# Altium PCB PCB1.PcbDoc
Units mm, origin at the board's own origin, x right, y up, seen from the top; angles counter-clockwise.
Board outline 80 x 100 mm, 2 copper layers (Top Layer, Bottom Layer); 99 components, 60 nets, 308 pads, 689 vias.
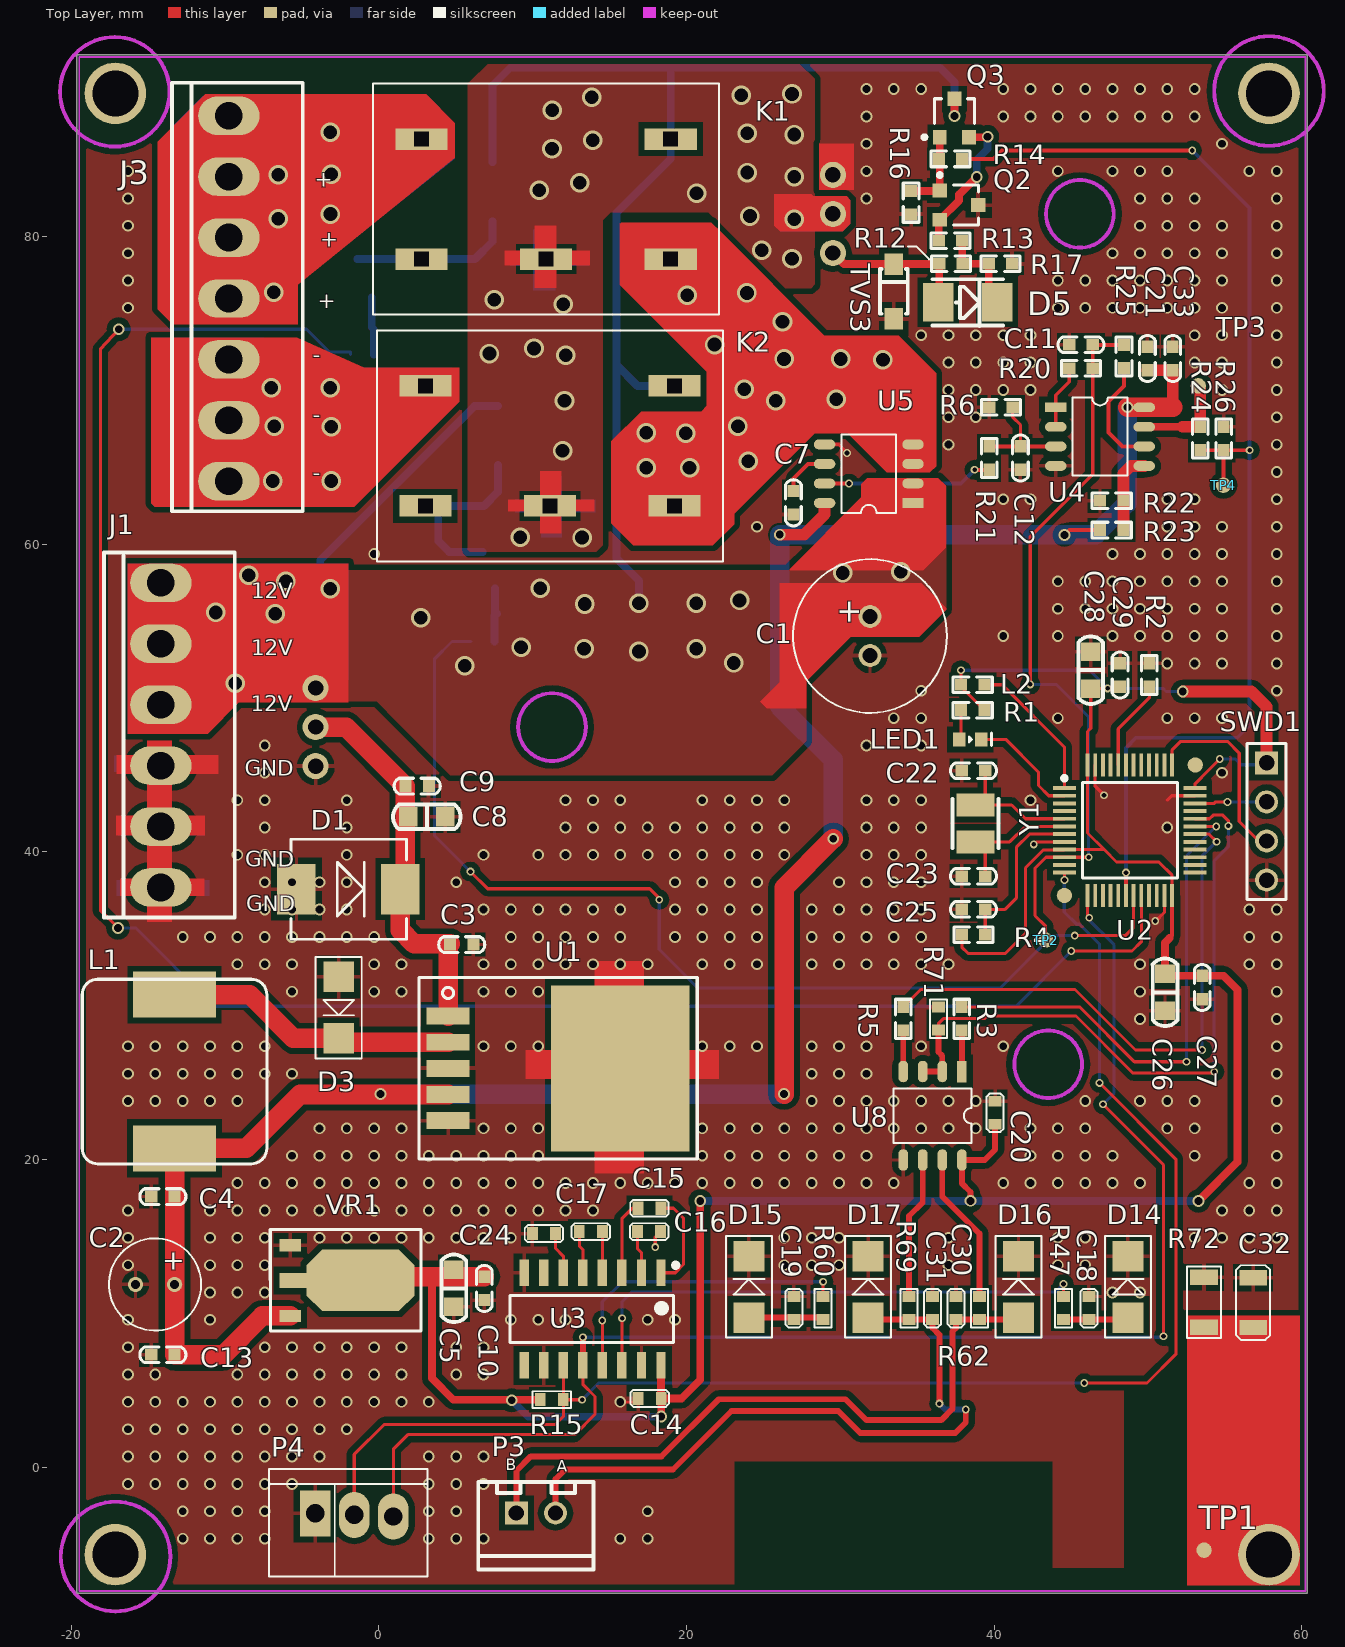
[diagram p0: Top Layer view]
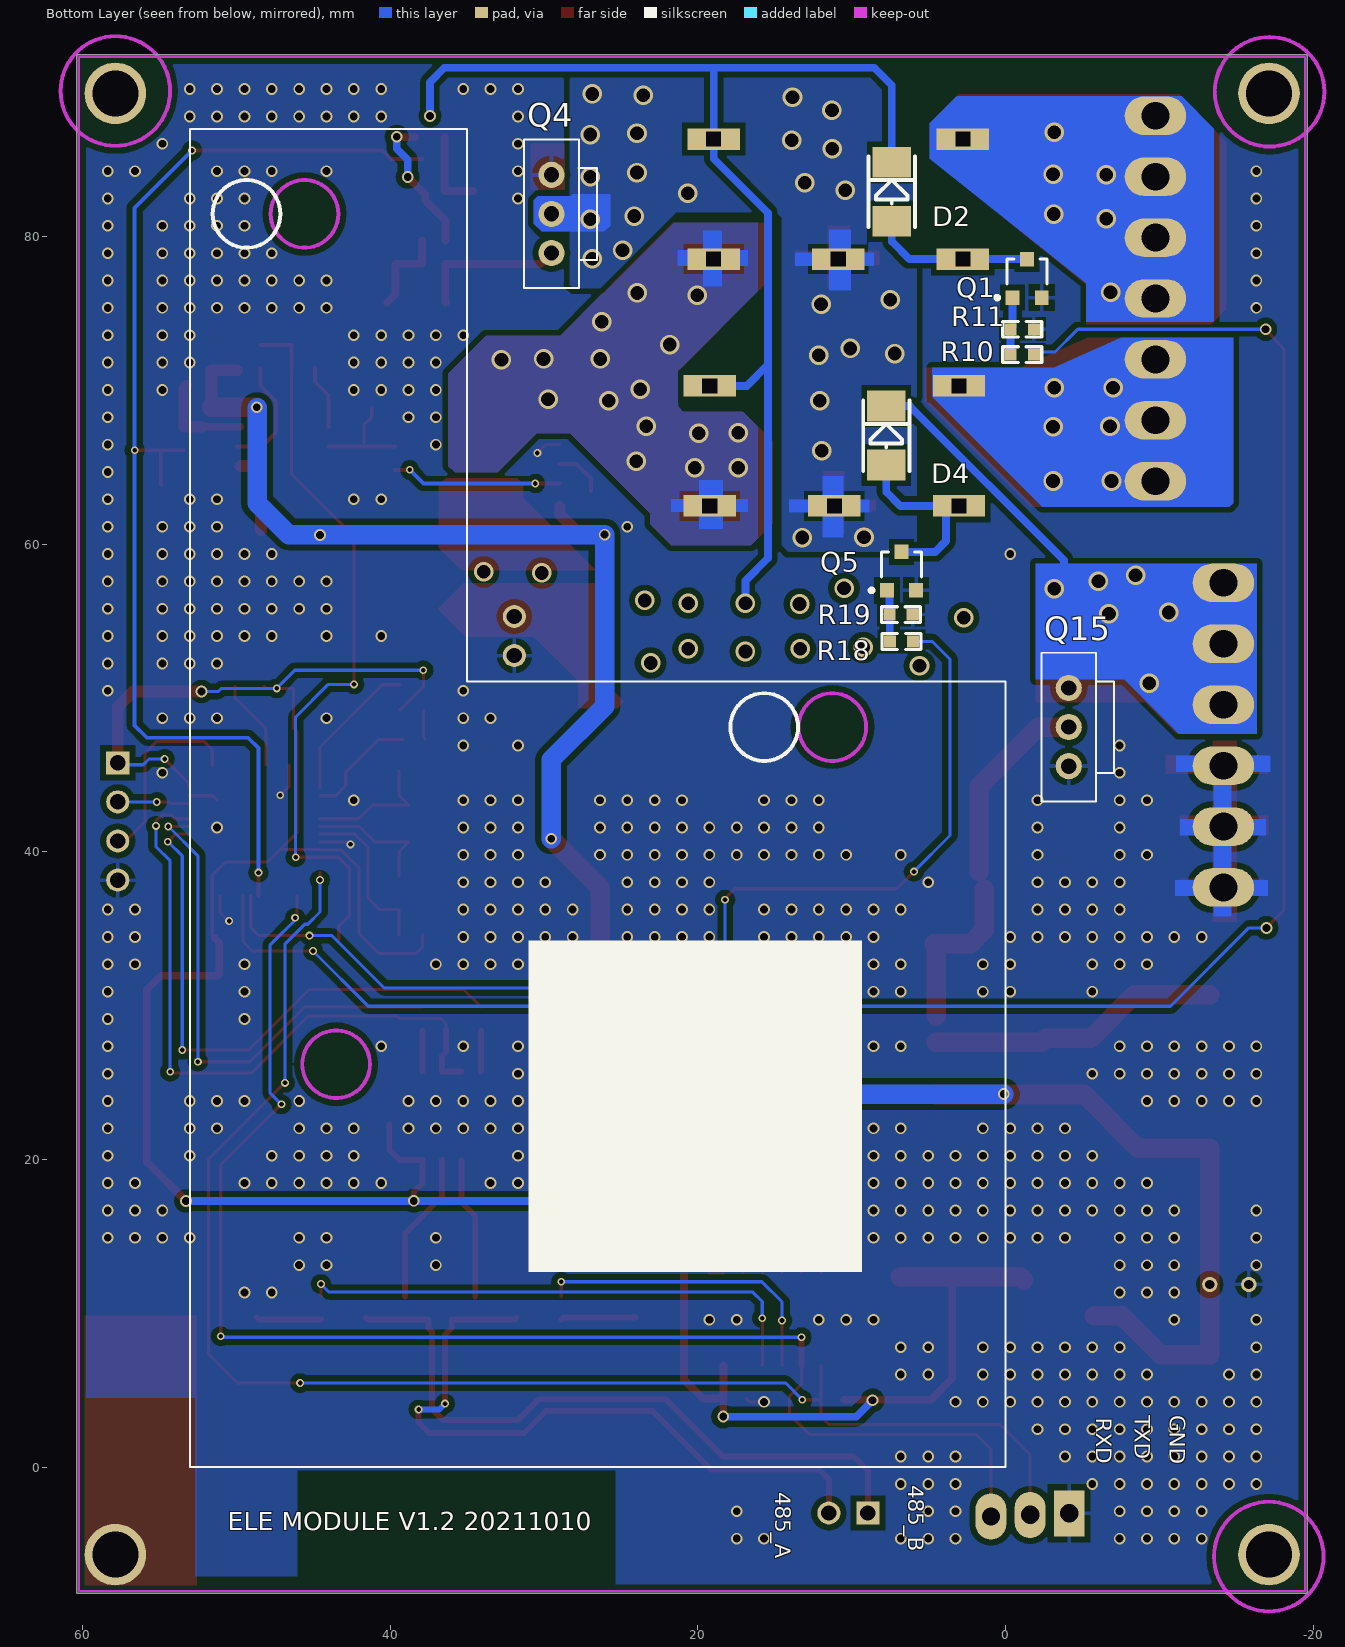
[diagram p1: Bottom Layer view, seen from below]
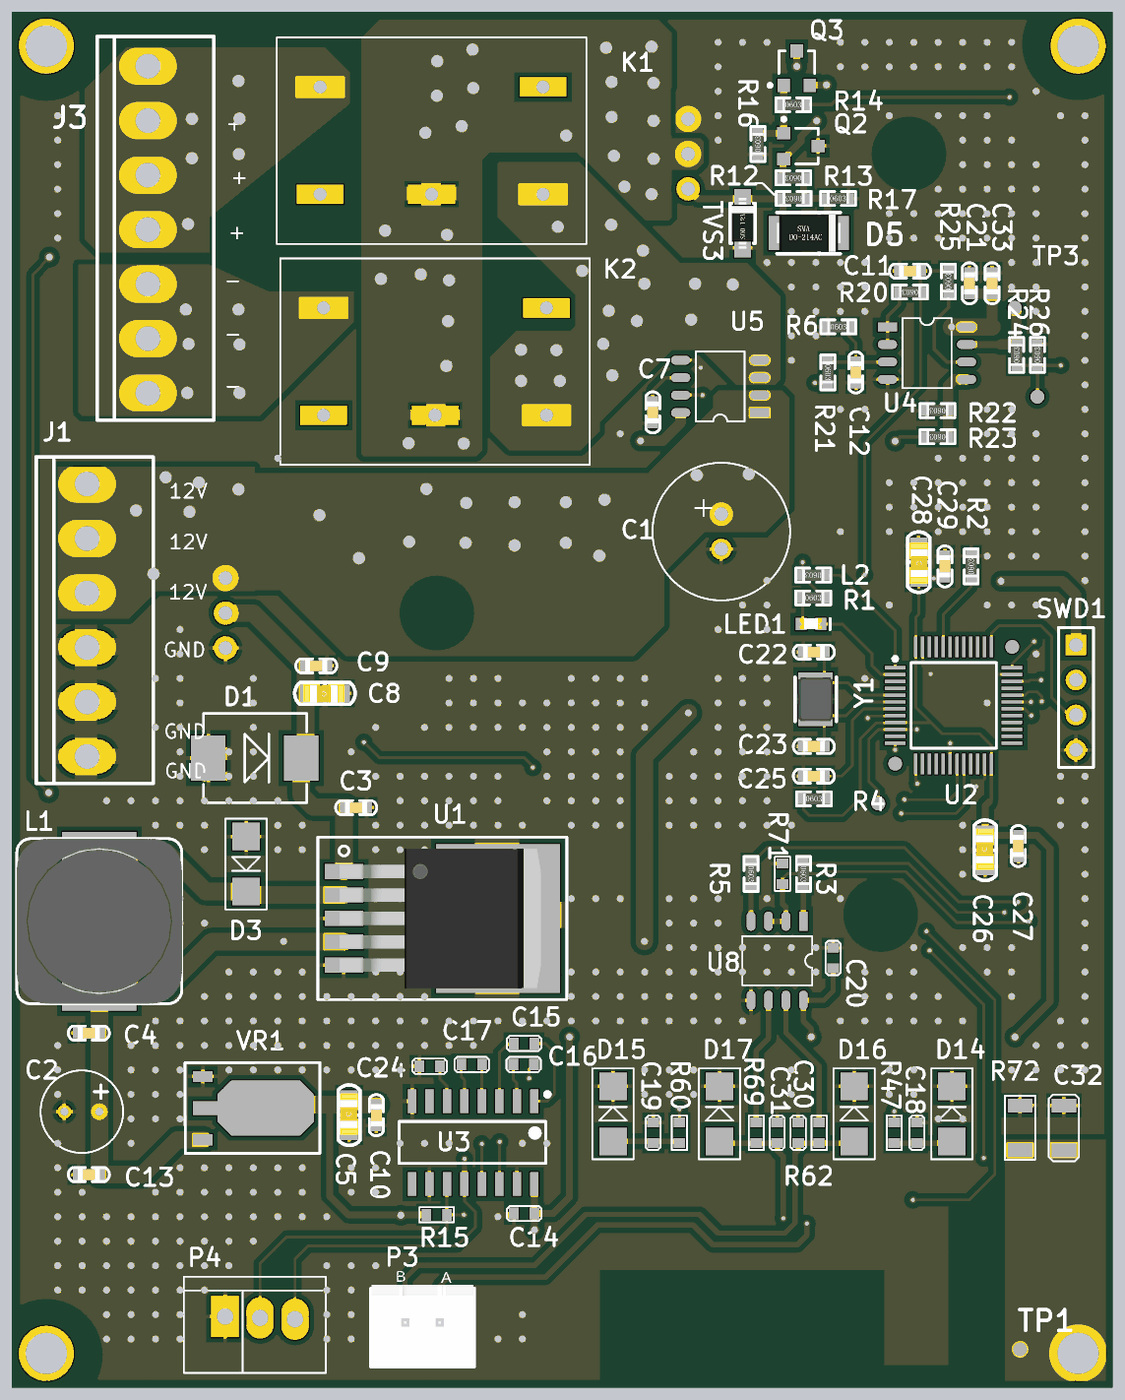
[diagram p2: 3D render of the assembled board from above, using the file's embedded part models]
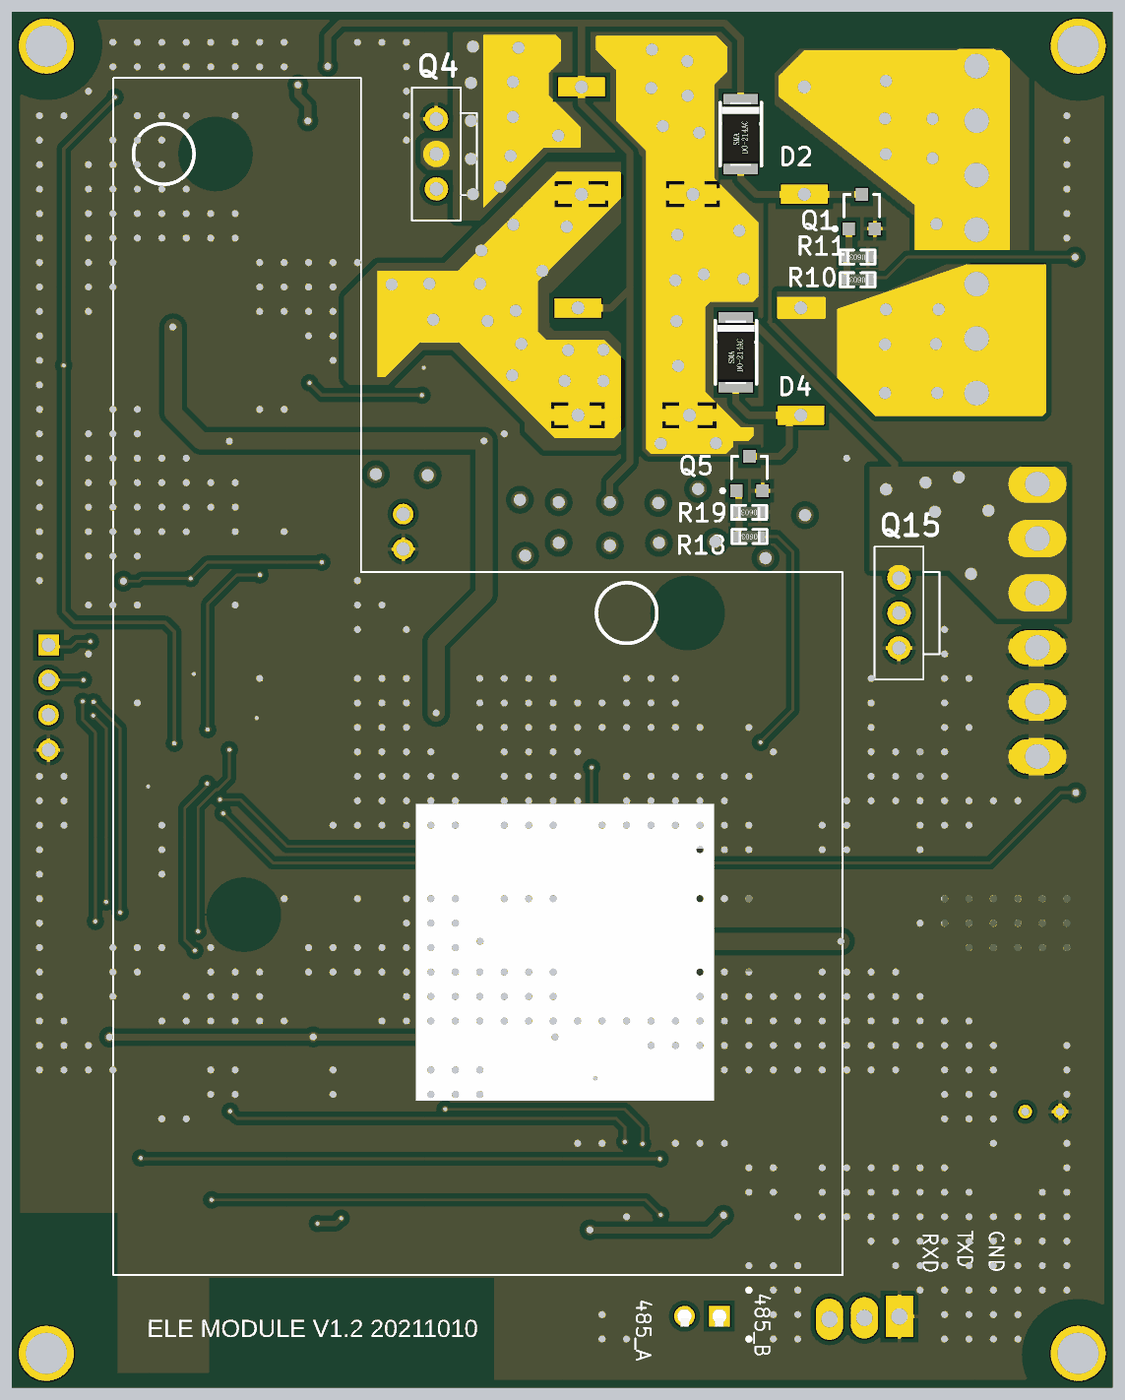
[diagram p3: 3D render of the assembled board from below, using the file's embedded part models]

## Layer stack, top to bottom
Top Solder: solder mask 0.0102, Solder Resist, Dk 3.5
Top Layer: signal copper 0.0356
Dielectric1: dielectric 0.32, FR-4, Dk 4.8
Bottom Layer: signal copper 0.0356
Bottom Solder: solder mask 0.0102, Solder Resist, Dk 3.5

## Board outline
-19.634,-8.195 -19.634,91.805 60.366,91.805 60.366,-8.195

## Design rules (kind name [scope] priority, off if disabled: settings)
Clearance gnd [All] p1: gap=0.381
Clearance [All] p2: gap=0.254
DiffPairsRouting [All] p1: maxlimit=0.254 minlimit=0.254 mostfreqgap=0.254 toplayer_minwidth=0.381 toplayer_maxwidth=0.381 toplayer_prefwidth=0.381 bottomlayer_minwidth=0.381 bottomlayer_maxwidth=0.381 bottomlayer_prefwidth=0.381 maxuncoupledlength=12.7
MinimumSolderMaskSliver [All] p1: minsoldermaskwidth=0.025
PolygonConnect PolygonConnect_1 [isvia] p1: connectstyle=Direct reliefconductorwidth=0.254 reliefentries=4 polygonreliefangle="90 Angle" airgapwidth=0.254
PolygonConnect [All] p2: connectstyle=Relief reliefconductorwidth=0.254 reliefentries=4 polygonreliefangle="90 Angle" airgapwidth=0.254
RoutingVias [All] p1: holewidth=0.711 width=1.27 viastyle="Through Hole" minholewidth=0.711 minwidth=1.27 maxholewidth=0.711 maxwidth=1.27
SilkToSolderMaskClearance [IsPad] p1: minsilkscreentomaskgap=0.025 clearancetoexposedcopper=TRUE
SolderMaskExpansion [All] p1: expansion=0.102
Width [All] p1: maxlimit=12.7 minlimit=0.127 preferedwidth=0.254
27 further rules are at their usual default settings.

## Classes and differential pairs
component class com: C14 C15 C16 C17 C18 C19 C20 C24 C30 C31 C32 D14 D15 D16 D17 P3 P4 R15 R47 R60 R62 R69 R71 R72 TP1 U3 U8
component class 07_EL_CON: C7 C11 C12 C21 C33 C? D2 D4 D5 J3 K1 K2 Q1 Q2 Q3 Q4 Q5 R6 R10 R11 R12 R13 R14 R16 R17 R18 R19 R20 R21 R22 R23 R24 R25 R26 R? TP2 TP3 TP4 TVS3 U4 U5 U?
component class 03_MCU: C22 C23 C25 C26 C27 C28 C29 L2 LED1 R1 R2 R3 R4 R5 SWD1 U2 Y1
component class 02_Power: C1 C2 C3 C4 C5 C8 C9 C10 C13 D1 D3 J1 L1 Q15 U1 VR1
differential pair 485: +485_P -485_N

## Components (designator, comment, footprint, x,y, rotation, side; value= is the part's Value field where it differs from the comment)
C1 "1000uF/35V" 10*16 31.928,54.026 r90 top
C2 "100uF/35V" 6*8 -14.554,11.871 r0 top
C3 "104 50V" SMD-0603C 5.385,33.969 r180 top
C4 "104 50V" SMD-0603C -14.046,17.586 r0 top
C5 "10uF 25V" SMD-0805C 4.877,11.617 r90 top
C7 "104 50V" SMD-0603C 26.949,62.687 r270 top
C8 "10uF25V" SMD-0805C 3.115,42.269 r180 top
C9 "104 50V" SMD-0603C 2.489,44.272 r180 top
C10 "104 50V" SMD-0603C 6.85,11.617 r90 top
C11 "NC" SMD-0603C 45.644,72.958 r0 top
C12 "104 50V" SMD-0603C 41.707,65.592 r270 top
C13 "104 50V" SMD-0603C -14.046,7.299 r0 top
C14 "104 50V" 0603C 18.35,4.467 r180 top
C15 "104 50V" 0603C 18.339,16.824 r180 top
C16 "104 50V" 0603C 16.815,15.3 r0 top
C17 "104 50V" 0603C 13.029,15.3 r0 top
C18 "220PF/16V" 0603C 46.152,9.585 r90 top
C19 "220PF/16V" 0603C 26.975,9.585 r90 top
C20 "104 50V" 0603C 40.056,22.285 r90 top
C21 "104 50V" SMD-0603C 49.962,72.069 r270 top
C22 "12P 50V" SMD-0603C 38.659,45.272 r180 top
C23 "12P 50V" SMD-0603C 38.659,38.414 r180 top
C24 "104 50V" 0603C 11.481,15.173 r180 top
C25 "104 50V" SMD-0603C 38.659,36.255 r0 top
C26 "10uF 25V" SMD-0805C 51.105,30.864 r90 top
C27 "104 50V" SMD-0603C 53.518,31.175 r90 top
C28 "10uF 25V" SMD-0805C 46.279,51.806 r270 top
C29 "104 50V" SMD-0603C 48.184,51.495 r270 top
C30 "220PF/16V" 0603C 37.516,9.585 r90 top
C31 "220PF/16V" 0603C 35.992,9.585 r90 top
C32 "1NF/2KV" 1206C 56.834,12.319 r270 top
C33 "104 50V" SMD-0603C 51.613,72.069 r270 top
D1 "SMCJ24CA" SMC -5.359,37.567 r0 top
D2 "1N4007" DO-214-AC 7.391,82.906 r90 bottom
D3 "SS34" SMA -2.616,31.873 r270 top
D4 "1N4007" DO-214-AC 7.747,67.056 r90 bottom
D5 "1N4007" DO-214-AC 38.278,75.717 r0 top
D14 "SMAJ18CA" SMA 48.692,9.712 r90 top
D15 "SMAJ18CA" SMA 24.054,9.712 r90 top
D16 "SMAJ6.5CA" SMA 41.58,9.712 r90 top
D17 "SMAJ6.5CA" SMA 31.801,9.712 r90 top
J1 "HEADER_6" VH-AW-3.96*6P -14.173,43.621 r90 top
J3 "Header 7" VH-AW-3.96*7P -9.754,70.028 r90 top
K1 "301-1C-C-R1-24VDC" 301-1C-C-R1-24VDC 2.769,78.535 r0 top
K2 "301-1C-C-R1-24VDC" 301-1C-C-R1-24VDC 3.023,62.482 r0 top
L1 "33uH/5a" CDRH-127 -13.284,25.714 r270 top
L2 "MPZ1608D101BTA00" SMD-0603 38.605,50.86 r180 top
LED1 "LED G" SMD-0603D 38.437,47.316 r0 top
P3 "XH2.54 2P" SIP-2A 10.211,-2.988 r0 top
P4 "1*3P" 3X2.54MMZ2 -4.14,-3.015 r0 top
Q1 "LH8050QLT1G" SOT-23 -1.41,77.276 r180 bottom
Q2 "mmbt63l" SOT-23 37.719,82.042 r270 top
Q3 "mmbt13L" SOT-23 37.414,87.706 r0 top
Q4 "AOT2610L" to220 29.515,78.927 r90 bottom
Q5 "LH8050QLT1G" SOT-23 6.756,58.242 r180 bottom
Q15 "AOTF4185" to220 -4.115,45.568 r90 bottom
R1 "1K" SMD-0603 38.605,49.209 r0 top
R2 "100K" SMD-0603 50.089,51.495 r90 top
R3 "1K" SMD-0603 37.897,29.143 r270 top
R4 "100K" SMD-0603 38.659,34.604 r0 top
R5 "1K" SMD-0603 34.087,29.143 r270 top
R6 "10K" SMD-0603 40.437,68.904 r0 top
R10 "2K" SMD-0603 -1.092,72.323 r0 bottom
R11 "5.1K" SMD-0603 -1.092,73.974 r0 bottom
R12 "100" SMD-0603 37.186,78.232 r180 top
R13 "7.8K" SMD-0603 37.16,79.731 r180 top
R14 "1K" SMD-0603 37.16,85.039 r0 top
R15 "4.7K" 0603R 10.489,4.378 r0 top
R16 "10K" SMD-0603 34.595,82.194 r90 top
R17 "4.7K" SMD-0603 40.411,78.232 r0 top
R18 "2K" SMD-0603 6.756,53.67 r0 bottom
R19 "5.1K" SMD-0603 6.782,55.423 r0 bottom
R20 "100R" SMD-0603 45.644,71.434 r180 top
R21 "10K" SMD-0603 39.675,65.592 r270 top
R22 "10K" SMD-0603 47.638,62.818 r180 top
R23 "21K" SMD-0603 47.638,60.913 r180 top
R24 "20K" SMD-0603 53.391,66.862 r90 top
R25 "47K" SMD-0603 48.438,72.196 r90 top
R26 "30K" SMD-0603 54.915,66.862 r90 top
R47 "22R 5%" 0603R 44.501,11.085 r270 top
R60 "22R 5%" 0603R 28.88,11.085 r270 top
R62 "8.2R 5%" 0603R 39.04,11.085 r270 top
R69 "8.2R 5%" 0603R 34.468,11.085 r270 top
R71 "10K" 0603R 36.373,28.405 r90 top
R72 "10M 5%" 1206r 53.645,12.327 r270 top
SWD1 "SIP-4 (NC)" SIP-4 57.709,41.97 r270 top
TP1 "TPS" tpd 53.645,-5.401 r90 top
TP2 "TPS" tpd 43.344,34.259 r0 top
TP3 "TPS" tpd 53.264,70.291 r0 top
TP4 "TPS" tpd 54.904,63.825 r0 top
TVS3 "SMF10CA" SOD-123 33.477,76.429 r90 top
U1 "LM2596S 5.0V" TO-263-5 4.496,25.919 r270 top
U2 "GD32F103C8T6" LQFP48 44.565,44.144 r0 top
U3 "TPT3232E-SO3R/NC" SO-16Z 18.339,12.633 r270 top
U4 "OPA2376AIDR" SO-8 44.003,68.894 r0 top
U5 "ACS712ELCTR-20A-T" SO-8 34.722,62.671 r180 top
U8 "TP8485E-SR" SO-8 37.897,25.714 r270 top
VR1 "LM1117 3.3V" SOT223 -5.764,14.425 r270 top
Y1 "8MHz" XTAL-3225-2 38.786,41.843 r270 top

## Footprints (in the part's own frame and the unit in brackets; to place one, negate y for a bottom-side part, rotate by r counter-clockwise, add the part's x,y. Pads: shape width x height; smd on the part's side, far side on the other; paste and mask are expansions set on the pad)
3X2.54MMZ2 [mm]
  rect 2x3 hole 1.2: 1(0,0)
  oval 2x3 hole 1.2: 2(2.54,-0.1) 3(5.08,-0.2)
  silkscreen extent -3,-4.1 7.31,2.9
6*8 [mm]
  round 1 hole 0.6: 1(1.27,0) 2(-1.27,0)
  silkscreen extent -3,-3 3,3
10*16 [mm]
  round 1.5 hole 1: 1(1.27,0) 2(-1.27,0)
  silkscreen extent -5,-5 5,5
301-1C-C-R1-24VDC [mm]
  rect 3.4x1.4 hole 0.95 square: 30(0,7.8) 85(0,0) 86(16.2,7.8) 87(8.1,0) 88(16.2,0)
  silkscreen extent -3.15,-3.6 19.35,11.4
0603C [mm]
  rect 0.7x0.85 smd: 1(0,0) 2(1.5,0)
  silkscreen extent -0.5,-0.55 2,0.55
0603R [mm]
  rect 0.7x0.85 smd: 1(0,0) 2(1.5,0)
  silkscreen extent -0.5,-0.55 2,0.55
1206C [mm]
  rect 1x1.8 smd: 1(0,0) 2(3.25,0)
  silkscreen extent -0.8,-1.1 4.05,1.1
1206r [mm]
  rect 1x1.8 smd: 1(0,0) 2(3.25,0)
  silkscreen extent -0.7,-1.1 3.95,1.1
CDRH-127 [mm]
  rect 3x5.4 smd: 1(-5,0) 2(5,0)
  silkscreen extent -6,-6 6,6, body extent -6,-6 6,6, height 8.2
DO-214-AC [mm]
  rect 2x2.5 smd: 1(-1.915,0) 2(1.915,0)
  silkscreen extent -2.3,-1.52 2.3,1.5, body extent -2.3,-1.35 2.3,1.35, height 2.4
LQFP48 [mm]
  round 1 smd: 0(0,-6.985) 0(8.509,1.5)
  rect 1.5x0.25 smd: 1(0,0) 2(0,-0.5) 3(0,-1) 4(0,-1.5) 5(0,-2) 6(0,-2.5) 7(0,-3) 8(0,-3.5) 9(0,-4) 10(0,-4.5) 11(0,-5) 12(0,-5.5) 25(8.495,-5.5) 26(8.495,-5) 27(8.495,-4.5) 28(8.495,-4) 29(8.495,-3.5) 30(8.495,-3) 31(8.495,-2.5) 32(8.495,-2) 33(8.495,-1.5) 34(8.495,-1) 35(8.495,-0.5) 36(8.495,0)
  rect 0.25x1.5 smd: 13(1.5,-7) 14(2,-7) 15(2.5,-7) 16(3,-7) 17(3.5,-7) 18(4,-7) 19(4.5,-7) 20(5,-7) 21(5.5,-7) 22(6,-7) 23(6.5,-7) 24(7,-7) 37(7,1.5) 38(6.5,1.5) 39(6,1.5) 40(5.5,1.5) 41(5,1.5) 42(4.5,1.5) 43(4,1.5) 44(3.5,1.5) 45(3,1.5) 46(2.5,1.5) 47(2,1.5) 48(1.5,1.5)
  silkscreen extent -0.13,-5.86 7.35,0.76
SIP-2A [mm]
  rect 1.5x1.5 hole 1: 1(-1.27,0)
  round 1.5 hole 1: 2(1.27,0)
  silkscreen extent -3.75,-3.68 3.75,2.02, body extent -3.7,-3.81 3.7,2.29, height 7.5
SIP-4 [mm]
  rect 1.5x1.5 hole 1: 1(-3.81,0)
  round 1.5 hole 1: 2(-1.27,0) 3(1.27,0) 4(3.81,0)
  silkscreen extent -5.08,-1.27 5.08,1.27
SMA [mm]
  rect 2x2 smd: 1(0,0) 2(4,0)
  silkscreen extent -1.3,-1.5 5.3,1.5
SMC [mm]
  rect 2.5x3.3 smd: 1(0,0) 2(6.75,0)
  silkscreen extent -0.35,-3.25 7.15,3.25
SMD-0603 [mil]
  rect 31.5x30 smd: 1(-30,0) 2(30,0)
  silkscreen extent -50,-20 50,20, body extent -31,-16 31,16, height 18
SMD-0603C [mil]
  rect 31.5x30 smd: 1(-30,0) 2(30,0)
  silkscreen extent -59,-20 59,20, body extent -32,-16 32,16, height 31
SMD-0603D [mm]
  rect 0.8x0.9 smd: 1(-0.7,-0.012) 2(0.73,-0.012)
  silkscreen extent -0.08,-0.41 1.4,0.39, body extent -0.8,-0.39 0.8,0.41, height 0.6
SMD-0805C [mm]
  rect 1.2x1.27 smd: 1(-1.2,0) 2(1.2,0)
  silkscreen extent -2.2,-0.8 2.2,0.8, body extent -1.42,-0.67 1.58,0.73, height 0.93
SO-8 [mil]
  rect 55x25 smd: 1(0,0)
  oval 55x25 smd: 2(0,-50) 3(0,-100) 4(0,-150) 5(226.38,-150) 6(226.38,-100) 7(226.38,-50) 8(226.38,0)
  silkscreen extent 43,-175 183,25
SO-16Z [mil]
  rect 68x24 smd: 1(0,0) 2(0,-50) 3(0,-100) 4(0,-150) 5(0,-200) 6(0,-250) 7(0,-300) 8(0,-350) 9(237.11,-350) 10(237.11,-300) 11(237.11,-250) 12(237.11,-200) 13(237.11,-150) 14(237.11,-100) 15(237.11,-50) 16(237.11,0)
  silkscreen extent -19,-387 178,38
SOD-123 [mm]
  rect 1.4x1.2 smd: 1(-1.778,0) 2(1.778,0)
  silkscreen extent -1.45,-0.9 1.45,0.9, body extent -1.85,-0.8 1.85,0.8, height 1.2
SOT223 [mm]
  rect 0.8x1.4 smd: 1(0,0) 3(4.6,0)
  rect 1x1.854 smd: 2(2.3,0.227)
  oct 4x7 smd: 4(2.286,4.572)
  silkscreen extent -1.02,-1.3 5.59,8.51
SOT-23 [mm] "SOT-23; 3 Leads; Body 3.0 x 2.6 mm, inc. leads (LxW max)"
  rect 0.9x0.95 smd: 1(-0.95,-1.25) 2(0.95,-1.25) 3(0,1.25)
  silkscreen extent -2.08,-1.37 1.3,1.25
to220 [mm]
  round 1.7 hole 1: 1(0,0) 2(2.54,0) 3(5.08,0)
  silkscreen extent -2.29,-2.95 7.37,1.78
TO-263-5 [mm]
  rect 1.1x2.8 smd: 1(-3.4,0) 2(-1.7,0) 3(0,0) 4(1.7,0) 5(3.4,0)
  rect 10.8x9 smd: 6(0,11.2)
  silkscreen extent -5.9,-1.9 5.9,16.2, body extent -5.08,-0.32 5.08,14.32, height 4.57
tpd [mm]
  round 1 smd: 1(0,0)
VH-AW-3.96*6P [mm]
  oval 2.5x4 hole 1.8: 1(-5.94,0) 2(-1.98,0) 3(1.98,0) 4(5.94,0) 5(9.9,0) 6(13.86,0)
  silkscreen extent -7.89,-4.8 15.82,3.7
VH-AW-3.96*7P [mm]
  oval 2.5x4 hole 1.8: 1(-5.94,0) 2(-1.98,0) 3(1.98,0) 4(5.94,0) 5(9.9,0) 6(13.86,0) 7(17.82,0)
  silkscreen extent -7.89,-4.8 19.96,3.7
XTAL-3225-2 [mm]
  rect 1.5x2.5 smd: 1(-1.2,0) 2(1.2,0)
  silkscreen extent -1.6,-1.5 1.6,1.5, body extent -1.6,-1.25 1.6,1.25, height 0.9

## Part data
C1 C2: library part CAP2, "电解电容"
C3 C4 C8 C9 C10 C11 C12 C13: library part CAP4, "贴片电容 10%"
C5 C21 C25 C26 C27 C28 C29 C33: library part CAP4, "贴片电容 20%"
C7: library part C, "贴片电容 10%"
C14 C15 C16 C17 C18 C19 C20 C24 C30 C31 C32: library part CAP
C22 C23: library part CAP4, "贴片电容 5%"
D1 D3: library part DIODE
D2 D4 D5: library part DIODE2, "贴片二极管"
D14 D15 D16 D17: library part D_ESD
J3: "Header, 7-Pin"
K1 K2: library part JDQ1, "5V 继电器"
L1: library part IND
L2: library part CIZHU1, "磁珠电感 100R 100MHz"
LED1: library part LED, "绿色普亮"
P3: library part SIP-2, "XH2.54 2P 直插"
P4: library part HDR1*3
Q1 Q3 Q5: library part NPN-1, "三极管"
Q2: library part PNP, "PNP"
Q4: library part SI7860
Q15: library part "MOSFET N", "MOSFET N"
R1 R20: library part RES0, "贴片电阻 5%"
R2 R3 R4 R5 R10 R11 R18 R19: library part RES2, "贴片电阻 5%"
R6 R21: library part RES0, "贴片电阻 1%"
R12 R13 R14 R16 R17 R22 R23 R24 R25 R26: library part RES-SOP, "贴片电阻 5%"
R15 R47 R60 R62 R69 R71 R72: library part RES
SWD1: library part SIP-4, "ISP 下载"
TVS3: library part TVS-1, "TVS 10V"
U1: library part LM2596
U2: library part STM32F103C6
U3: library part TPT3232E-SO3R
U4: library part LM358, "运算放大器"
U5: library part ACS712, "HALL 20A 电流传感器"
VR1: library part LM1117, "三端稳压器"
Y1: library part XTAL, "3225 贴片晶振"

## Free pads (board coordinates)
  round 4 hole 3: 0(-17.134,-5.695) 0(-17.134,89.305) 0(57.866,-5.695) 0(57.866,89.305)

## Via types
v1: diameter 0.762, hole 0.508, Top Layer to Bottom Layer, tented both sides, 575 vias
v2: diameter 1.27, hole 0.889, Top Layer to Bottom Layer, tented both sides, 74 vias
v3: diameter 0.508, hole 0.305, Top Layer to Bottom Layer, tented both sides, 40 vias

## Nets (pads, with @x,y where several pads share a name; then routed paths per layer and width w, separated by ;. In a path a pad name is that pad's centre, name@x,y a point inside that pad or via, vN(x,y) a via of type N, cw(c..) or ccw(c..) an arc to the next point about the centre after c; other vN are vias at no path point)
3.3V: C5.2 C10.2 C14.1 C20.1 C26.2 C27.2 C28.2 C29.2 L2.2 R1.2 R4.1 R15.1 SWD1.1 U2.9 U2.24 U2.36 U2.48 U3.16 U8.8 VR1.2 VR1.4 | length 183.6
  Top Layer w0.203: C14.1@18.339,4.478 C14.1 ; v3(37.843,51.797) L2.2 37.843,50.733 R1.2 R1.2@39.307,49.209 ; R4.1 37.897,33.794 38.294,33.397 40.735,33.397 42.033,34.695 42.033,38.957 43.201,40.125 44.545,40.125 U2.9 47.143,40.144 ; C29.2 48.057,50.606 C28.2 46.279,48.034 46.065,47.82 U2.48 46.065,41.223 47.143,40.144 ; U2.24 51.565,38.468 50.695,39.338 47.95,39.338 47.143,40.144 ; U2.36 53.06,44.42 53.929,45.29 53.929,45.303 v3(54.661,46.034)
  Top Layer w0.254: 51.401,34.388 51.565,34.551 U2.24
  Top Layer w0.381: v1(38.465,17.305) 38.465,17.882 37.897,18.45 U8.8 39.386,19.964 40.056,20.634 C20.1
  Top Layer w0.508: 3.454,12.379 3.454,5.768 4.844,4.378 R15.1 ; C14.1@18.339,4.478 U3.16 ; v1(18.35,3.281) C14.1 19.679,4.467 20.895,5.683 v1(20.895,17.297) ; 51.401,34.388 51.105,34.091 C26.2 51.232,31.937 C27.2 54.911,31.937 55.82,31.028 55.82,19.84 v1(53.277,17.297)
  Top Layer w0.762: v1(52.261,50.422) 56.715,50.422 57.709,49.428 SWD1.1
  Top Layer w1.27: VR1.4 -0.953,12.379 3.454,12.379 C10.2
  Bottom Layer w0.203: v3(37.843,51.797) 46.199,51.797 v3(47.374,50.622) 50.967,50.622 51.167,50.422 v1(52.261,50.422) ; v3(54.661,46.034) 55.677,46.034 56.058,45.653 57.582,45.653 SWD1.1
  Bottom Layer w0.508: v1(8.636,4.341) 9.708,3.269 v1@18.35,3.269 ; v1(20.895,17.297) v1(53.277,17.297)
485_N: C30.1 D16.1 P3.1 R62.2 | length 44
  Top Layer w0.381: P3.1@8.941,-3.115 P3.1 8.941,-0.956 8.941,-0.24 9.876,0.696 18.373,0.696 22.088,4.411 30.337,4.411 31.699,3.048 36.551,3.048 37.287,3.785 37.287,8.816 37.516,9.045 C30.1 R62.2 41.453,9.585 D16.1
485_P: C31.1 D17.1 P3.2 R69.2 | length 44.4
  Top Layer w0.381: P3.2@11.481,-3.215 P3.2 11.481,-1.337 11.481,-0.787 12.105,-0.162 19.126,-0.162 22.926,3.638 29.865,3.638 31.293,2.21 37.465,2.21 38.151,2.896 v3(38.151,3.743) ; D17.1 31.928,9.585 R69.2 C31.1 35.992,9.045 36.436,8.6 v3(36.436,4.124)
  Bottom Layer w0.381: v3(36.436,4.124) 36.817,3.743 v3(38.151,3.743)
ELE_PWM: R14.2 R24.1 R26.1 TP4.1 U2.18 | length 77.9
  Top Layer w0.254: R14.2 39.952,85.039 40.507,85.594 v3(52.874,85.594) ; U2.18 v3(48.565,38.642) ; R24.1 R26.1 ; TP4.1 54.915,63.836 R26.1 ; v3(56.607,66.1) R26.1
  Bottom Layer w0.254: v3(48.565,38.642) 48.565,46.743 49.232,47.41 55.799,47.41 56.607,48.218 v3(56.607,66.1) 56.607,81.86 v3(52.874,85.594)
EN1_485: R71.1 U2.32 U8.2 U8.3 | length 43.3
  Top Layer w0.203: R71.1 36.373,28.83 36.692,29.15 38.425,29.15 38.427,29.152 39.37,29.152 39.539,29.321 45.316,29.321 49.024,25.613 54.215,25.613 v3(54.301,25.7) ; U2.32 53.995,42.144 54.232,42.381 54.86,42.381 55.223,42.018 v3(55.223,41.683)
  Top Layer w0.381: U8.3 U8.2 36.627,26.73 36.373,26.984 R71.1
  Bottom Layer w0.203: v3(54.301,25.7) 54.301,39.405 55.223,40.327 v3(55.223,41.683)
GND: C1.2 C2.2 C3.1 C4.1 C5.1 C7.2 C8.1 C9.1 C10.1 C11.1 C12.2 C13.1 C14.2 C16.2 C18.2 C19.2 C20.2 C21.1 C22.2 C23.2 C24.2 C25.1 C26.1 C27.1 C28.1 C29.1 C30.2 C31.2 C32.1 C33.1 D1.1 D3.1 D14.2 D15.2 D16.2 D17.2 J1.1 J1.2 J1.3 P4.1 Q1.2 Q2.3 Q4.3 Q5.2 Q15.1 R2.2 R6.1 R11.1 R16.1 R17.2 R19.1 R22.2 R26.2 R71.2 R72.1 SWD1.4 TVS3.1 U1.3 U1.5 U1.6 U2.8 U2.23 U2.35 U2.47 U3.8 U3.10 U3.15 U4.4 U5.5 U8.5 VR1.1 | length 12.4
  Top Layer w0.203: v1(15.692,4.238) 16.621,4.238 C14.2 ; v3@18.034,14.367 v3(17.965,14.298) 17.965,14.951 C16.2 ; U5.5 29.878,66.481 v3@30.484,65.876 ; v3@42.561,40.468 42.718,40.625 44.545,40.625 U2.8 ; U2.47 46.565,44.257 v3(47.143,43.678) ; v3@50.47,35.455 51.065,36.05 U2.23 ; 51.252,43.354 51.542,43.644 U2.35
  other v1: -12.756,-4.652 -10.978,-4.652 -9.2,-4.652 -7.422,-4.652 3.246,-4.652 5.024,-4.652 6.802,-4.652 15.692,-4.652 17.47,-4.652 -12.756,-2.874 -10.978,-2.874 -9.2,-2.874 -7.422,-2.874 3.246,-2.874 5.024,-2.874 17.47,-2.874 -16.312,-1.096 -14.534,-1.096 -12.756,-1.096 -10.978,-1.096 -9.2,-1.096 -7.422,-1.096 -5.644,-1.096 3.246,-1.096 5.024,-1.096 6.802,-1.096 -16.312,0.682 -14.534,0.682 -12.756,0.682 -10.978,0.682 -9.2,0.682 -7.422,0.682 -5.644,0.682 -3.866,0.682 3.246,0.682 5.024,0.682 6.802,0.682 -16.312,2.46 -14.534,2.46 -12.756,2.46 -10.978,2.46 -9.2,2.46 -7.422,2.46 -5.644,2.46 -3.866,2.46 -2.088,2.46 -16.312,4.238 -14.534,4.238 -12.756,4.238 -10.978,4.238 -9.2,4.238 -7.422,4.238 -5.644,4.238 -3.866,4.238 -2.088,4.238 -0.31,4.238 1.468,4.238 3.246,4.238 -16.312,6.016 -14.534,6.016 -9.2,6.016 -7.422,6.016 -5.644,6.016 -3.866,6.016 -2.088,6.016 -0.31,6.016 1.468,6.016 5.024,6.016 6.802,6.016 -16.312,7.794 -7.422,7.794 -5.644,7.794 -3.866,7.794 -2.088,7.794 -0.31,7.794 1.468,7.794 5.024,7.794 6.802,7.794 -16.312,9.572 -10.978,9.572 8.58,9.572 10.358,9.572 12.136,9.572 17.47,9.572 19.248,9.572 -10.978,11.35 -9.2,11.35 -7.422,11.35 47.696,11.35 49.474,11.35 -16.312,13.128 -10.978,13.128 -9.2,13.128 -7.422,13.128 26.36,13.128 28.138,13.128 29.916,13.128 37.028,13.128 44.14,13.128 45.918,13.128 -16.312,14.906 -10.978,14.906 -9.2,14.906 -7.422,14.906 -3.866,14.906 -2.088,14.906 -0.31,14.906 1.468,14.906 3.246,14.906 5.024,14.906 6.802,14.906 8.58,14.906 26.36,14.906 28.138,14.906 29.916,14.906 37.028,14.906 44.14,14.906 45.918,14.906 53.03,14.906 54.808,14.906 56.586,14.906 58.364,14.906 -16.312,16.684 -10.978,16.684 -9.2,16.684 -7.422,16.684 -5.644,16.684 -3.866,16.684 -2.088,16.684 -0.31,16.684 1.468,16.684 3.246,16.684 5.024,16.684 6.802,16.684 8.58,16.684 10.358,16.684 12.136,16.684 13.914,16.684 54.808,16.684 56.586,16.684 58.364,16.684 -9.2,18.462 -7.422,18.462 -5.644,18.462 -3.866,18.462 -2.088,18.462 -0.31,18.462 1.468,18.462 3.246,18.462 5.024,18.462 6.802,18.462 8.58,18.462 10.358,18.462 12.136,18.462 13.914,18.462 15.692,18.462 17.47,18.462 19.248,18.462 21.026,18.462 22.804,18.462 24.582,18.462 26.36,18.462 28.138,18.462 29.916,18.462 31.694,18.462 33.472,18.462 40.584,18.462 42.362,18.462 44.14,18.462 45.918,18.462 47.696,18.462 49.474,18.462 56.586,18.462 58.364,18.462 -5.644,20.24 -3.866,20.24 -2.088,20.24 -0.31,20.24 1.468,20.24 3.246,20.24 5.024,20.24 6.802,20.24 8.58,20.24 10.358,20.24 21.026,20.24 22.804,20.24 24.582,20.24 26.36,20.24 28.138,20.24 29.916,20.24 31.694,20.24 42.362,20.24 44.14,20.24 45.918,20.24 47.696,20.24 53.03,20.24 58.364,20.24 -3.866,22.018 -2.088,22.018 -0.31,22.018 1.468,22.018 6.802,22.018 8.58,22.018 10.358,22.018 21.026,22.018 22.804,22.018 24.582,22.018 26.36,22.018 28.138,22.018 29.916,22.018 31.694,22.018 33.472,22.018 35.25,22.018 37.028,22.018 38.806,22.018 42.362,22.018 44.14,22.018 45.918,22.018 51.252,22.018 53.03,22.018 58.364,22.018 -16.312,23.796 -14.534,23.796 -12.756,23.796 -10.978,23.796 -9.2,23.796 28.138,23.796 29.916,23.796 31.694,23.796 33.472,23.796 35.25,23.796 37.028,23.796 38.806,23.796 45.918,23.796 49.474,23.796 51.252,23.796 53.03,23.796 58.364,23.796 -16.312,25.574 -14.534,25.574 -12.756,25.574 -10.978,25.574 -9.2,25.574 -7.422,25.574 -5.644,25.574 28.138,25.574 29.916,25.574 31.694,25.574 58.364,25.574 -16.312,27.352 -14.534,27.352 -12.756,27.352 -10.978,27.352 -9.2,27.352 -7.422,27.352 6.802,27.352 8.58,27.352 10.358,27.352 21.026,27.352 22.804,27.352 24.582,27.352 28.138,27.352 29.916,27.352 31.694,27.352 35.25,27.352 40.584,27.352 58.364,27.352 49.474,29.13 58.364,29.13 -5.644,30.908 -0.31,30.908 1.468,30.908 6.802,30.908 8.58,30.908 10.358,30.908 49.474,30.908 58.364,30.908 -9.2,32.686 -7.422,32.686 -5.644,32.686 -0.31,32.686 1.468,32.686 6.802,32.686 8.58,32.686 10.358,32.686 12.136,32.686 13.914,32.686 15.692,32.686 17.47,32.686 21.026,32.686 22.804,32.686 24.582,32.686 28.138,32.686 29.916,32.686 31.694,32.686 33.472,32.686 35.25,32.686 37.028,32.686 49.474,32.686 56.586,32.686 58.364,32.686 -12.756,34.464 -10.978,34.464 -9.2,34.464 -7.422,34.464 -5.644,34.464 -3.866,34.464 -2.088,34.464 -0.31,34.464 8.58,34.464 10.358,34.464 12.136,34.464 13.914,34.464 15.692,34.464 19.248,34.464 21.026,34.464 22.804,34.464 24.582,34.464 28.138,34.464 29.916,34.464 31.694,34.464 33.472,34.464 35.25,34.464 56.586,34.464 58.364,34.464 -7.422,36.242 -5.644,36.242 -3.866,36.242 -2.088,36.242 6.802,36.242 8.58,36.242 10.358,36.242 12.136,36.242 13.914,36.242 15.692,36.242 19.248,36.242 21.026,36.242 22.804,36.242 24.582,36.242 28.138,36.242 29.916,36.242 31.694,36.242 33.472,36.242 35.25,36.242 56.586,36.242 58.364,36.242 -7.422,38.02 -5.644,38.02 -3.866,38.02 -2.088,38.02 5.024,38.02 19.248,38.02 21.026,38.02 22.804,38.02 24.582,38.02 29.916,38.02 31.694,38.02 33.472,38.02 35.25,38.02 -9.2,39.798 -7.422,39.798 -2.088,39.798 6.802,39.798 10.358,39.798 12.136,39.798 13.914,39.798 15.692,39.798 17.47,39.798 19.248,39.798 21.026,39.798 22.804,39.798 24.582,39.798 26.36,39.798 31.694,39.798 33.472,39.798 35.25,39.798 -7.422,41.576 -2.088,41.576 12.136,41.576 13.914,41.576 15.692,41.576 17.47,41.576 19.248,41.576 21.026,41.576 22.804,41.576 24.582,41.576 26.36,41.576 31.694,41.576 33.472,41.576 35.25,41.576 51.252,41.576 -9.2,43.354 -7.422,43.354 -2.088,43.354 12.136,43.354 13.914,43.354 15.692,43.354 21.026,43.354 22.804,43.354 24.582,43.354 26.36,43.354 31.694,43.354 33.472,43.354 35.25,43.354 42.362,43.354 -7.422,45.132 54.808,45.132 -7.422,46.91 31.694,46.91 35.25,46.91 33.472,48.688 35.25,48.688 44.14,48.688 51.252,48.688 53.03,48.688 54.808,48.688 35.25,50.466 58.364,50.466 51.252,52.244 53.03,52.244 54.808,52.244 58.364,52.244 40.584,54.022 44.14,54.022 47.696,54.022 49.474,54.022 51.252,54.022 53.03,54.022 54.808,54.022 58.364,54.022 44.14,55.8 45.918,55.8 47.696,55.8 49.474,55.8 51.252,55.8 53.03,55.8 54.808,55.8 58.364,55.8 44.14,57.578 45.918,57.578 47.696,57.578 49.474,57.578 51.252,57.578 53.03,57.578 54.808,57.578 58.364,57.578 -0.31,59.356 47.696,59.356 49.474,59.356 51.252,59.356 53.03,59.356 54.808,59.356 58.364,59.356 24.582,61.134 51.252,61.134 53.03,61.134 54.808,61.134 58.364,61.134 40.584,62.912 42.362,62.912 51.252,62.912 53.03,62.912 58.364,62.912 58.364,64.69 37.028,66.468 58.364,66.468 37.028,68.246 38.806,68.246 58.364,68.246 37.028,70.024 38.806,70.024 40.584,70.024 42.362,70.024 54.808,70.024 58.364,70.024 37.028,71.802 38.806,71.802 40.584,71.802 42.362,71.802 53.03,71.802 54.808,71.802 58.364,71.802 35.25,73.58 37.028,73.58 38.806,73.58 40.584,73.58 42.362,73.58 53.03,73.58 54.808,73.58 58.364,73.58 -16.312,75.358 44.14,75.358 45.918,75.358 47.696,75.358 49.474,75.358 51.252,75.358 53.03,75.358 54.808,75.358 58.364,75.358 -16.312,77.136 44.14,77.136 45.918,77.136 47.696,77.136 49.474,77.136 51.252,77.136 53.03,77.136 54.808,77.136 58.364,77.136 -16.312,78.914 47.696,78.914 49.474,78.914 51.252,78.914 53.03,78.914 54.808,78.914 58.364,78.914 -16.312,80.692 49.474,80.692 51.252,80.692 53.03,80.692 54.808,80.692 58.364,80.692 -16.312,82.47 31.694,82.47 49.474,82.47 51.252,82.47 53.03,82.47 58.364,82.47 -16.312,84.248 31.694,84.248 44.14,84.248 47.696,84.248 49.474,84.248 51.252,84.248 56.586,84.248 58.364,84.248 31.694,86.026 54.808,86.026 31.694,87.804 40.584,87.804 42.362,87.804 44.14,87.804 45.918,87.804 47.696,87.804 49.474,87.804 51.252,87.804 53.03,87.804 31.694,89.582 33.472,89.582 35.25,89.582 40.584,89.582 42.362,89.582 44.14,89.582 45.918,89.582 47.696,89.582 49.474,89.582 51.252,89.582 53.03,89.582
  other v3: 50.47,35.503 42.574,40.481 30.43,65.929
J3-2: C19.1 D15.1 R60.2 | length 4.9
  Top Layer w0.381: D15.1 28.753,9.712 R60.2
J3-3: C18.1 D14.1 R47.2 | length 4.2
  Top Layer w0.381: R47.2 C18.1 48.565,9.585 D14.1
LED1: LED1.2 U2.2 | length 7.4
  Top Layer w0.203: LED1.2 40.747,47.304 42.885,45.167 42.885,44.304 43.544,43.644 U2.2
NetC7_1: C7.1 U5.6 | length 3.2
  Top Layer w0.254: C7.1 26.949,64.258 27.902,65.211 U5.6
NetC11_2: C11.2 R20.1 R25.2 TP2.1 U2.10 | length 48.3
  Top Layer w0.203: v3(42.346,50.883) 42.346,60.485 46.406,64.545 R20.1 ; TP2.1 43.344,35.155 42.651,35.848 42.651,38.928 43.367,39.644 U2.10 v3(46.142,39.644)
  Top Layer w0.254: R20.1 C11.2 R25.2
  Bottom Layer w0.203: v3(42.346,50.883) 44.017,50.883 46.142,48.758 v3(46.142,39.644)
NetC12_1: C12.1 R6.2 R21.1 U4.3 | length 7.1
  Top Layer w0.203: R6.2 41.199,68.259 41.707,67.751 C12.1
  Top Layer w0.254: R21.1 C12.1 U4.3
NetC15_1: C15.1 U3.1 | length 6.4
  Top Layer w0.203: U3.1 19.262,12.633 19.797,13.169 19.797,16.183 19.156,16.824 C15.1
NetC15_2: C15.2 U3.3 | length 4.8
  Top Layer w0.203: U3.3 15.799,16.148 16.476,16.824 C15.2
NetC16_1: C16.1 U3.2 | length 2.8
  Top Layer w0.203: C16.1 16.815,14.193 17.069,13.939 U3.2
NetC17_1: C17.1 U3.5 | length 2.8
  Top Layer w0.203: C17.1 13.029,14.375 13.259,14.145 U3.5
NetC17_2: C17.2 U3.4 | length 2.7
  Top Layer w0.203: U3.4 C17.2
NetC22_1: C22.1 U2.5 Y1.1 | length 8.6
  Top Layer w0.203: C22.1 39.421,43.678 Y1.1 41.132,43.043 42.031,42.144 U2.5
NetC23_1: C23.1 U2.6 Y1.2 | length 8.7
  Top Layer w0.203: C23.1 39.421,40.008 Y1.2 41.003,40.643 42.004,41.644 U2.6
NetC24_1: C24.1 U3.6 | length 2.8
  Top Layer w0.203: C24.1 11.481,14.219 11.989,13.711 U3.6
NetC32_2: C32.2 pad.0@57.866,-5.695 R72.2 TP1.1
NetD2_1: D2.1 K1.85 Q1.3 | length 10.6
  Bottom Layer w0.508: Q1.3 2.76,78.526 K1.85 6.246,78.535 7.391,79.68 D2.1
NetD3_2: D3.2 L1.1 U1.2 | length 19.1
  Top Layer w1.27: L1.1 -8.396,30.714 -5.555,27.873 D3.2 -2.362,27.619 U1.2
NetD4_1: D4.1 K2.85 Q5.3 | length 11.5
  Bottom Layer w0.508: K2.85 6.83,62.482 7.747,63.398 D4.1 ; 3.861,61.688 3.861,60.198 4.567,59.492 Q5.3
NetD5_1: D5.1 Q4.1 R12.2 TVS3.2 | length 9.8
  Top Layer w0.508: Q4.1 30.236,78.207 TVS3.2 36.398,78.207 R12.2 36.424,75.778 D5.1
NetD5_2: D5.2 R12.1 R13.1 R17.1 | length 6
  Top Layer w0.508: R13.1 37.922,78.257 R12.1 R17.1 39.649,76.261 D5.2
NetJ3_1: J3.1 J3.2 J3.3 K2.30
  other v2: -6.893,64.104 -3.095,64.104 -3.095,67.624 -6.797,67.661 -6.997,70.164 -3.168,70.164
NetJ3_4: J3.4 J3.5 J3.6 J3.7 K1.30
  other v2: -6.833,76.378 -6.553,81.153 -3.15,81.458 -6.553,84.023 -3.095,84.04 -3.168,86.773
NetK1_87: K1.87 K2.87 Q4.2
  other v2: 13.208,60.427 9.195,60.452 11.938,66.065 12.065,69.317 12.141,72.288 7.188,72.39 10.084,72.72 11.989,75.59 7.493,75.895 26.856,78.546 24.892,79.096 27.002,81.112 24.123,81.33 20.65,82.804 10.414,83.007 13.056,83.49 27.002,83.88 23.953,84.157 11.252,85.7 13.894,86.258 27.002,86.628 23.953,86.701 11.278,88.214 13.843,89.052 23.546,89.187 26.856,89.265
NetL2_1: L2.1 U2.1 | length 9.5
  Top Layer w0.203: L2.1 40.519,50.86 44.565,46.815 U2.1
NetLED1_1: LED1.1 R1.1 | length 1.9
  Top Layer w0.203: LED1.1 37.843,47.411 R1.1
NetQ1_1: Q1.1 R10.2 R11.2 | length 3.8
  Bottom Layer w0.508: Q1.1 -0.46,74.104 R11.2 R10.2
NetQ2_1: Q2.1 Q3.1 R14.1 R16.2 | length 5.4
  Top Layer w0.508: R16.2 36.433,82.956 Q2.1 36.464,82.997 Q3.1
NetQ2_2: Q2.2 Q3.2 R13.2 | length 9.3
  Top Layer w0.508: R13.2 36.398,81.021 Q2.2 37.719,82.342 37.719,82.728 v1(38.862,83.871) ; Q3.2 39.542,86.456 v1(39.573,86.487)
  Bottom Layer w0.508: v1(38.862,83.871) 38.862,84.988 39.573,85.7 v1(39.573,86.487)
NetQ5_1: Q5.1 R18.2 R19.2 | length 3.8
  Bottom Layer w0.203: R19.2@7.569,55.321 R19.2@7.706,55.458
  Bottom Layer w0.508: R18.2 7.518,55.321 R19.2@7.671,55.474 ; R19.2 Q5.1@7.544,57.125
NetR2_1: R2.1 U2.44 | length 5.9
  Top Layer w0.203: U2.44 48.065,47.99 50.089,50.014 R2.1
NetR3_1: R3.1 U2.31 | length 33.5
  Top Layer w0.203: R3.1 45.558,29.905 49.114,26.349 v3(52.502,26.349) ; U2.31 v3(54.431,41.644)
  Bottom Layer w0.203: v3(52.502,26.349) 52.502,39.736 v3@54.412,41.647
NetR5_1: R5.1 U2.30 | length 37
  Top Layer w0.203: R5.1 35.23,31.048 45.253,31.048 49.19,27.111 v3(53.518,27.111) ; U2.30 53.961,41.144 v3(54.46,40.646)
  Bottom Layer w0.203: v3(53.518,27.111) 53.518,39.732 v3@54.412,40.626
NetR10_1: R10.1 U2.20 | length 129.1
  Top Layer w0.203: v1(-16.964,35.05) -18.11,36.196 -18.11,72.674 v1(-16.914,73.972) ; v3(45.013,33.547) 48.96,33.547 49.565,34.152 U2.20
  Bottom Layer w0.203: v1(-16.964,35.05) -15.824,35.05 -10.731,29.957 41.422,29.957 v3(45.013,33.547) ; v1(-16.914,73.972) -4.707,73.972 -3.226,72.492 -1.854,72.492 R10.1
NetR18_1: R18.1 U2.19 | length 69.7
  Top Layer w0.203: v3(5.951,38.71) 7.069,37.592 17.602,37.592 v3@18.313,36.881 ; v3(45.24,34.548) 48.524,34.548 49.065,35.089 U2.19
  Bottom Layer w0.203: R18.1 4.75,53.67 3.607,52.527 3.607,41.054 v3(5.951,38.71) v3@6.019,38.642 ; v3(18.227,36.885) 18.227,33.68 18.212,33.664 20.728,31.148 40.385,31.148 43.785,34.548 v3(45.24,34.548)
NetR20_2: R20.2 U4.1 U4.2 | length 4.2
  Top Layer w0.254: U4.2 U4.1 44.003,69.679 44.882,70.558 R20.2
NetR21_2: R21.2 U5.7 | length 11
  Top Layer w0.254: U5.7 v3(30.563,63.941) ; v3(38.729,64.83) R21.2
  Bottom Layer w0.254: v3(30.563,63.941) 37.825,63.941 v3@38.709,64.825
NetR22_1: R22.1 R23.1 U4.5 | length 5.2
  Top Layer w0.762: R23.1 R22.1 48.4,64.591 48.893,65.084 U4.5
NetR24_2: R24.2 TP3.1 U4.7 | length 7
  Top Layer w0.5: U4.7 52.248,67.624 51.603,67.624
  Top Layer w0.762: 52.248,67.624 R24.2 53.391,70.164 TP3.1
NetR25_1: R25.1 U4.6 | length 7.5
  Top Layer w0.254: R25.1 48.438,70.278 47.422,69.262 47.422,67.263 48.331,66.354 U4.6@49.962,66.354
NetR47_1: R47.1 U3.14 | length 34.1
  Top Layer w0.203: U3.14 v3@15.799,9.68 ; R47.1 v3(44.501,11.902)
  Bottom Layer w0.203: v3(15.814,9.68) 15.814,10.76 16.428,11.375 43.974,11.375 v3(44.501,11.902)
NetR60_1: R60.1 U3.13 | length 20
  Top Layer w0.203: v3(14.522,9.531) 14.529,9.525 U3.13 ; R60.1 v3(28.88,12.048)
  Bottom Layer w0.203: v3(14.522,9.531) 14.522,10.736 15.835,12.048 v3(28.88,12.048)
NetR62_1: R62.1 U8.7 | length 9.9
  Top Layer w0.381: U8.7 36.627,17.586 39.04,15.173 R62.1
NetR69_1: R69.1 U8.6 | length 9.2
  Top Layer w0.381: R69.1 34.468,16.316 35.357,17.205 U8.6
RST: C25.2 R4.2 U2.7 | length 10.8
  Top Layer w0.203: R4.2 C25.2 40.713,36.255 41.442,36.985 41.442,40.288 42.298,41.144 U2.7
RXD1_485: R3.2 U8.1 | length 2.7
  Top Layer w0.381: U8.1 R3.2
RXD_233: P4.3 U2.13 U3.12 | length 93.1
  Top Layer w0.203: P4.3 0.94,1.163 1.886,2.109 12.72,2.109 14.046,3.435 14.046,4.586 13.259,5.374 U3.12 ; U2.13 46.065,35.617 46.16,35.712 v3(46.177,35.712) ; v3(47.07,23.583) 51.01,19.643 v3(51.01,8.504)
  Top Layer w0.381: U3.12 v3(13.259,8.442)
  Bottom Layer w0.203: v3(13.259,8.442) 50.949,8.442 v3(51.01,8.504) ; v3@46.057,35.69 47.8,33.947 47.8,24.312 v3(47.07,23.583)
SWCLK: SWD1.3 U2.37 | length 12.6
  Top Layer w0.203: U2.37 51.565,46.621 52.121,47.177 55.169,47.177 55.931,46.415 55.931,41.97 57.201,40.7 SWD1.3
SWDIO: SWD1.2 U2.34 | length 4.7
  Top Layer w0.203: U2.34 54.311,43.144 54.407,43.24 v3(55.169,43.24)
  Bottom Layer w0.203: v3(55.169,43.24) SWD1.2
TXD1_485: R5.2 U8.4 | length 2.7
  Top Layer w0.381: U8.4 R5.2
TXD_232: P4.2 R15.2 U2.12 U3.11 | length 97.3
  Top Layer w0.203: P4.2 -1.6,0.822 0.341,2.764 11.467,2.764 11.989,3.286 R15.2 ; U3.11 R15.2 ; v3(13.212,4.378) R15.2 ; v3(44.565,38.169) U2.12 ; v3(45.851,5.46) 49.932,5.46 51.808,7.336 51.808,20.012 v3(46.842,24.978)
  Bottom Layer w0.203: v3(13.212,4.378) 14.294,5.46 v3(45.851,5.46) ; v3@44.557,38.144 44.557,36.083 45.355,35.285 45.545,35.285 46.842,33.988 v3(46.842,24.978)
VDD5V: C2.1 C4.2 C13.2 C21.2 C33.2 L1.2 R23.2 U1.4 U4.8 U5.8 VR1.3 | length 149.6
  Top Layer w0.254: v1(44.566,60.594) 44.885,60.913 R23.2
  Top Layer w0.762: v1(26.057,60.616) 27.637,60.616 28.972,61.951 U5.8@28.972,62.432 ; C21.2 C33.2 51.613,68.904 51.603,68.894
  Top Layer w1.27: VR1.3 -7.585,9.825 -10.111,7.299 C13.2 C2.1 C4.2 L1.2 -8.632,20.714 -5.127,24.219 U1.4 ; v1(26.338,24.246) 26.338,37.658 v1(29.531,40.852) ; v1(48.671,68.894) U4.8 51.603,68.894
  Bottom Layer w1.27: v1(0.108,24.246) v1(26.338,24.246) ; v1(29.531,40.852) 29.531,45.982 26.057,49.457 v1(26.057,60.616) 46.594,60.616 48.651,62.673 v1@48.651,68.865
VDD12V: C3.2 C8.2 C9.2 D1.2 Q15.2 U1.1 | length 23.9
  Top Layer w1.27: Q15.2 -2.134,48.108 1.702,44.272 D1.2@1.702,38.71 ; D1.2 1.391,34.906 2.286,34.011 C3.2@4.496,34.011 ; U1.1 C3.2@4.496,34.011 ; C3.2@4.623,34.011 C3.2@4.496,34.011
VDD12V1: C1.1 D2.2 D4.2 J1.4 J1.5 J1.6 K1.86 K2.86 Q3.3 Q15.3 U5.1 U5.2 | length 98
  Top Layer w0.508: v1(37.414,87.838) Q3.3
  Bottom Layer w0.508: -3.81,57.099 -3.81,58.947 6.214,68.971 D4.2 ; D2.2 7.391,89.822 8.534,90.965 19.025,90.965 ; v2(16.903,56.161) 16.903,57.62 15.443,59.08 15.443,71.653 ; K2.86 16.815,70.282 15.443,71.653 ; v1(37.414,87.838) 37.414,90.03 36.479,90.965 19.025,90.965 ; 15.443,71.653 15.443,81.534 18.969,85.059 K1.86 18.969,90.909 19.025,90.965
  other v2: -9.347,50.952 5.588,52.095 23.063,52.273 16.903,53.019 13.337,53.207 20.625,53.207 9.239,53.287 2.718,55.22 -6.729,55.463 -10.617,55.559 13.386,56.107 20.625,56.161 23.444,56.337 -3.168,57.093 10.49,57.125 -6.045,57.591 -8.458,57.972 30.147,58.128 33.921,58.201
VO+: K1.88 K2.88 U5.3 U5.4
  other v2: 17.374,64.973 20.193,64.973 24.003,65.38 19.939,67.208 17.374,67.234 23.343,67.666 25.792,69.33 29.735,69.427 23.749,70.079 32.766,71.984 26.34,72.04 30.026,72.04 21.819,72.974 26.238,74.447 20.041,76.175 23.927,76.327
pads on no net: U2.0 U2.3 U2.4 U2.11 U2.14 U2.15 U2.16 U2.17 U2.21 U2.22 U2.25 U2.26 U2.27 U2.28 U2.29 U2.33 U2.38 U2.39 U2.40 U2.41 U2.42 U2.43 U2.45 U2.46 U3.7 U3.9

## Polygon pours and split planes (outlines as drawn)
NetK1_87 on Top Layer "Top Layer-No Net" (solid, remove dead copper, pour order 12): 6.756,59.492 14.128,59.492 14.3,59.665 14.554,59.919 14.554,61.519 14.554,81.051 14.91,81.407 15.062,81.559 17.475,81.559 21.412,81.559 24.867,78.105 26.334,76.637 27.735,76.637 28.098,76.637 28.346,76.886 28.321,76.911 28.321,79.019 28.321,90.246 27.356,91.211 27.305,91.262 17.424,91.262 7.112,91.262 5.969,90.119 5.766,89.916 5.766,88.9 5.766,59.633 5.906,59.492 6.756,59.492
GND on Top Layer "Top Layer-No Net" (solid, remove dead copper, pour order 7): -22.123,-15.596 -21.585,-15.058 23.096,-15.596 23.096,0.362 43.794,0.362 43.794,-6.542 48.43,-6.542 48.43,5.075 79.615,5.075 81.32,78.297 68.406,91.21 66.254,93.363 -24.007,93.363 -24.007,-12.771 -21.316,-15.461
VDD12V1 on Top Layer "Mechanical 1-No Net" (solid, pour order 6): 36.373,64.287 31.75,64.287 31.344,63.881 31.369,63.856 31.369,63.017 31.369,62.967 27.483,59.08 26.695,58.293 15.367,58.293 -2.362,58.293 -2.794,57.861 -6.248,54.407 -6.248,52.934 -6.248,51.085 -5.19,50.027 -4.933,49.77 -3.237,49.77 -0.144,49.77 1.196,48.429 4.642,44.983 21.209,44.983 25.58,44.983 27.331,46.734 27.788,47.191 27.788,52.984 27.788,53.238 28.854,54.305 28.857,54.308 31.357,54.308 35.359,54.308 36.373,55.321 36.881,55.829 36.881,62.459 36.881,63.779 36.373,64.287
VO+ on Bottom Layer "Top Layer-No Net" (solid, remove dead copper, pour order 22): 15.748,80.899 21.615,80.899 28.956,73.558 33.782,73.558 36.22,71.12 36.22,65.075 35.814,64.668 33.02,64.668 30.48,67.208 28.321,67.208 23.089,61.976 23.089,61.29 21.717,59.919 16.535,59.919 16.053,60.401 16.053,67.615 17.043,68.605 20.961,68.605 21.215,68.859 21.285,68.859 21.285,71.196 21.311,71.222 15.672,76.86 15.672,80.823
NetK1_87 on Bottom Layer "Top Layer-No Net" (solid, remove dead copper, pour order 14): 6.756,59.492 14.128,59.492 14.3,59.665 14.554,59.919 14.554,61.519 14.554,81.229 14.884,81.559 17.475,81.559 21.412,81.559 24.867,78.105 26.334,76.637 27.735,76.637 28.098,76.637 28.346,76.886 28.321,76.911 28.321,79.019 28.321,90.246 27.356,91.211 27.305,91.262 17.424,91.262 7.112,91.262 5.969,90.119 5.766,89.916 5.766,88.9 5.766,59.633 5.906,59.492
GND on Bottom Layer "Top Layer-No Net" (solid, remove dead copper, pour order 8): -19.888,-16.154 -19.35,-15.616 25.332,-16.154 25.332,-0.197 46.029,-0.197 46.029,-7.101 52.684,-7.101 52.684,4.516 81.85,4.516 83.555,77.738 70.641,90.651 68.489,92.804 -21.771,92.804 -21.771,-13.33 -19.081,-16.02

## Keep-outs
Keep-Out Layer:
  circle w0.254: c43.512,26.187 r2.2
  circle w0.254: c11.254,48.108 r2.2
  circle w0.254: c45.569,81.467 r2.2
  circle w0.254: c-17.12,-5.817 r3.561
  circle w0.254: c-17.17,89.408 r3.561
  circle w0.254: c57.866,89.458 r3.561
  lines w0.127: -19.479,-8.057 -19.479,91.664 60.223,91.664 60.223,-8.057 -19.479,-8.057

## Other copper
Top Layer:
  rectangle net NetK1_87: 8.179,78.105 13.716,79.096
  rectangle net NetK1_87: 10.109,76.657 11.557,80.721
  rectangle net NetK1_87: 10.465,60.681 11.862,64.745
  rectangle net NetK1_87: 8.407,62.128 14.021,62.89
  rectangle net VDD12V1: 30.15,54.127 34.036,56.896
  rectangle net GND: 28.626,83.007 30.886,86.055
  rectangle net GND: -16.84,37.135 -11.328,38.252
  rectangle net GND: -17.094,41.072 -11.303,42.367
  rectangle net GND: -15.062,35.433 -13.462,47.244
  rectangle net GND: -17.069,45.06 -10.414,46.279
  rectangle net NetC32_2: 52.545,-7.687 59.868,9.839
  rectangle net GND: 9.532,25.238 22.12,27.128
  rectangle net GND: 14.03,19.091 17.25,32.903
  region net VO+: 15.748,80.899 21.615,80.899 22.25,80.264 28.956,73.558 33.782,73.558 36.22,71.12 36.22,65.075 35.814,64.668 33.02,64.668 30.48,67.208 28.321,67.208 23.089,61.976 23.089,61.29 21.717,59.919 16.535,59.919 15.113,61.341 15.113,66.675 17.043,68.605 20.961,68.605 21.311,68.984 21.311,71.222 15.672,76.86 15.672,80.823
  region net NetJ3_1: -0.964,71.476 5.232,71.476 5.232,69.266 -1.609,62.424 -14.561,62.424 -14.808,62.671 -14.808,73.431 -5.318,73.431
  region net NetJ3_4: 3.073,89.23 4.928,87.376 4.928,85.106 -5.262,76.869 -5.262,74.309 -5.262,80.092 -5.262,74.309 -13.392,74.309 -14.367,75.284 -14.367,86.166 -11.303,89.23
  region net VDD12V1: 31.369,63.043 26.695,58.369 26.695,58.293 35.382,58.293 36.855,59.766 36.855,63.805 36.373,64.287 31.75,64.287 31.344,63.881 31.344,63.043 31.369,63.017
  pour cut-out: 12.624,49.86 12.344,50.14 10.287,50.14 9.195,49.047 9.195,47.117 10.135,46.177 12.395,46.177 13.36,47.142 13.36,49.022 12.243,50.14
  region net NetK1_87: 25.705,82.737 28.118,82.737 28.245,82.61 30.404,82.61 30.658,82.356 30.658,80.832 30.15,80.324 26.086,80.324 25.705,80.705
  region net VDD12V1: -1.981,58.734 -1.981,49.708 -9.103,49.708 -11.125,47.685 -16.332,47.685 -16.332,58.734
  region net VDD12V1: 36.881,55.729 35.128,53.975 30.683,53.975 27.788,51.079 27.788,49.341 25.208,49.341 24.79,49.759 26.057,51.025 26.057,57.455 35.255,57.455 36.881,55.829
Bottom Layer:
  rectangle net NetK1_87: 8.56,78.08 13.665,78.969
  rectangle net NetK1_87: 8.839,62.052 14.072,62.916
  rectangle net NetK1_87: 10.541,60.427 11.887,64.44
  rectangle net NetK1_87: 10.033,76.479 11.481,80.442
  rectangle net VO+: 16.739,62.078 21.742,62.941
  rectangle net VO+: 18.364,60.985 19.914,64.16
  rectangle net VO+: 16.739,78.08 21.311,79.121
  rectangle net VO+: 18.44,76.759 19.66,80.391
  rectangle net GND: -17.069,37.109 -11.024,38.176
  rectangle net GND: -16.942,41.072 -11.354,42.139
  rectangle net GND: -17.221,45.187 -11.074,46.253
  rectangle net GND: -14.681,35.789 -13.513,46.304
  region net NetJ3_4: 3.175,89.103 4.928,87.351 4.928,85.059 -5.262,76.945 -5.262,74.473 -13.556,74.473 -13.556,87.003 -11.455,89.103
  region net NetK1_87: 25.705,82.737 28.118,82.737 28.245,82.61 30.404,82.61 30.658,82.356 30.658,80.832 30.15,80.324 26.086,80.324 25.705,80.705
  region net VDD12V1: -1.981,58.734 -1.981,51.206 -7.731,51.206 -11.252,47.685 -16.332,47.685 -16.332,58.734
  region net NetJ3_1: -3.137,71.476 4.75,71.476 4.75,69.571 -2.397,62.424 -14.561,62.424 -14.808,62.671 -14.808,73.431 -7.491,73.431

## Silkscreen, mask and mechanical layers (free items; w line width, h text height)
Top Overlay:
  lines w0.127: 34.392,79.35 34.925,79.35 35.763,78.511
  text "+" at -4.178,83.227 h1.02
  text "+" at -3.824,79.319 h1.02
  text "+" at -3.988,75.318 h1.02
  text "-" at -4.293,71.818 h1.02
  text "-" at -4.293,67.929 h1.02
  text "-" at -4.293,64.155 h1.02
  text "12V" at -8.302,56.485 h1.02
  text "12V" at -8.302,52.787 h1.02
  text "12V" at -8.331,49.138 h1.02
  text "GND" at -8.718,44.949 h1.02
  text "GND" at -8.687,39.014 h1.02
  text "GND" at -8.636,36.144 h1.02
  text "B" at 8.255,-0.483 h1.27
  text "A" at 11.557,-0.559 h1.27
Bottom Overlay:
  circle w0.254: c49.337,81.467 r2.2
  circle w0.254: c15.682,48.108 r2.2
  rectangle: 9.339,12.686 31.005,34.232
  lines w0.127: 52.984,87 35,87 35,51.079 0,51.079 0,0 53,0 53,87
  text "GND" at -10.693,3.353 h1.02 r90
  text "TXD" at -8.407,3.353 h1.02 r90
  text "RXD" at -5.893,3.2 h1.02 r90
  text "485_B" at 6.325,-1.194 h1.02 r90
  text "485_A" at 14.961,-1.626 h1.02 r90
  text "ELE MODULE V1.2 20211010" at 50.546,-4.496 h2.03
Bottom Solder:
  region: 9.195,90.068 8.382,89.256 8.382,87.427 9.296,86.512 9.296,79.705 6.096,76.505 6.096,71.12 6.502,70.714 9.627,70.714 9.957,70.383 9.957,64.187 7.365,61.595 6.452,61.595 6.452,60.985 6.833,60.604 7.925,60.604 7.925,60.198 8.458,59.665 13.919,59.665 14.275,60.02 14.275,81.712 16.434,83.871 16.434,87.605 16.485,87.605 17.932,89.052 17.932,89.992 17.856,90.068
  region: 26.111,77.546 21.717,81.94 19.025,81.94 19.025,83.414 21.361,85.75 21.361,87.325 20.472,88.214 20.472,89.764 20.828,90.119 26.111,90.119
  region: 2.769,89.002 4.648,87.122 4.648,85.655 -5.262,77.763 -5.262,74.473 -12.167,74.473 -12.167,88.392 -11.557,89.002
  region: 20.752,80.188 27.965,72.974 33.807,72.974 33.807,65.253 33.249,65.253 30.759,67.742 27.838,67.742 20.93,60.833 16.586,60.833 15.773,61.646 15.773,66.421 17.323,67.97 21.539,67.97 22.149,68.58 22.149,72.187 15.9,78.435 15.9,79.883 16.205,80.188
  region: 0.381,70.204 0.381,65.202 -2.397,62.424 -14.561,62.424 -14.808,62.671 -14.808,73.558 -9.343,73.558
Mechanical 1:
  circle w0.254: c43.512,26.187 r2.2
  circle w0.254: c11.254,48.108 r2.2
  circle w0.254: c45.595,81.467 r2.2
  lines w0.127: -19.634,-8.195 60.366,-8.195 60.366,91.805 -19.634,91.805 -19.634,-8.195

## Text inside footprints (layer, text, board x,y; h text height)
C1: Top Overlay "+" at 31.217,54.712 h1.52 r90
C2: Top Overlay "+" at -14.087,12.829 h1.27